# Altium PCB ASP LEDBoard.PcbDoc
Units mm, origin at the board's own origin, x right, y up, seen from the top; angles counter-clockwise.
Board outline 80 x 35 mm, 2 copper layers (Top Layer, Bottom Layer); 57 components, 34 nets, 166 pads, 30 vias.
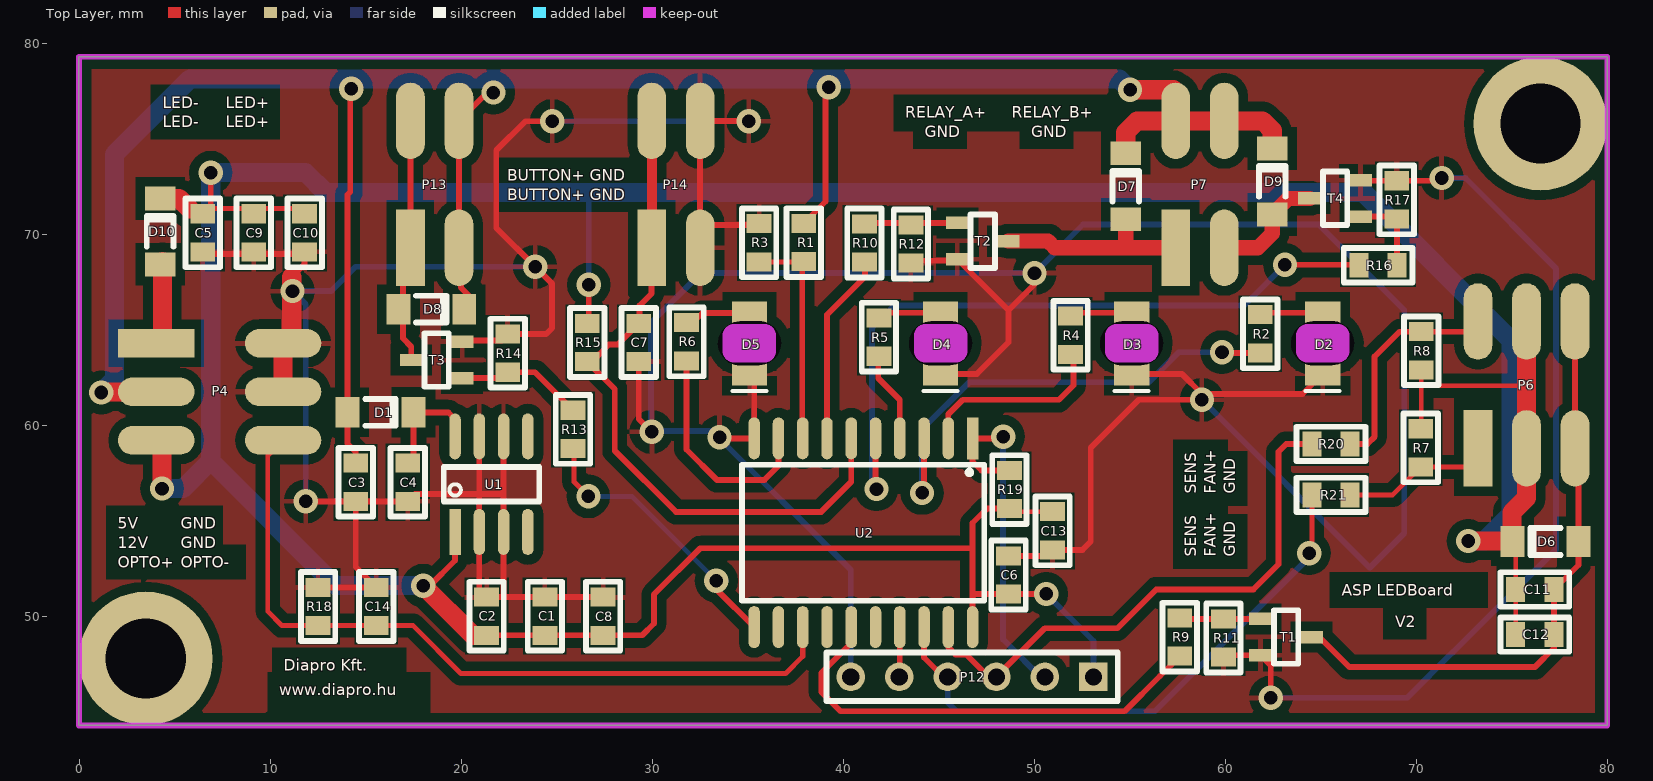
[diagram p0: Top Layer view]
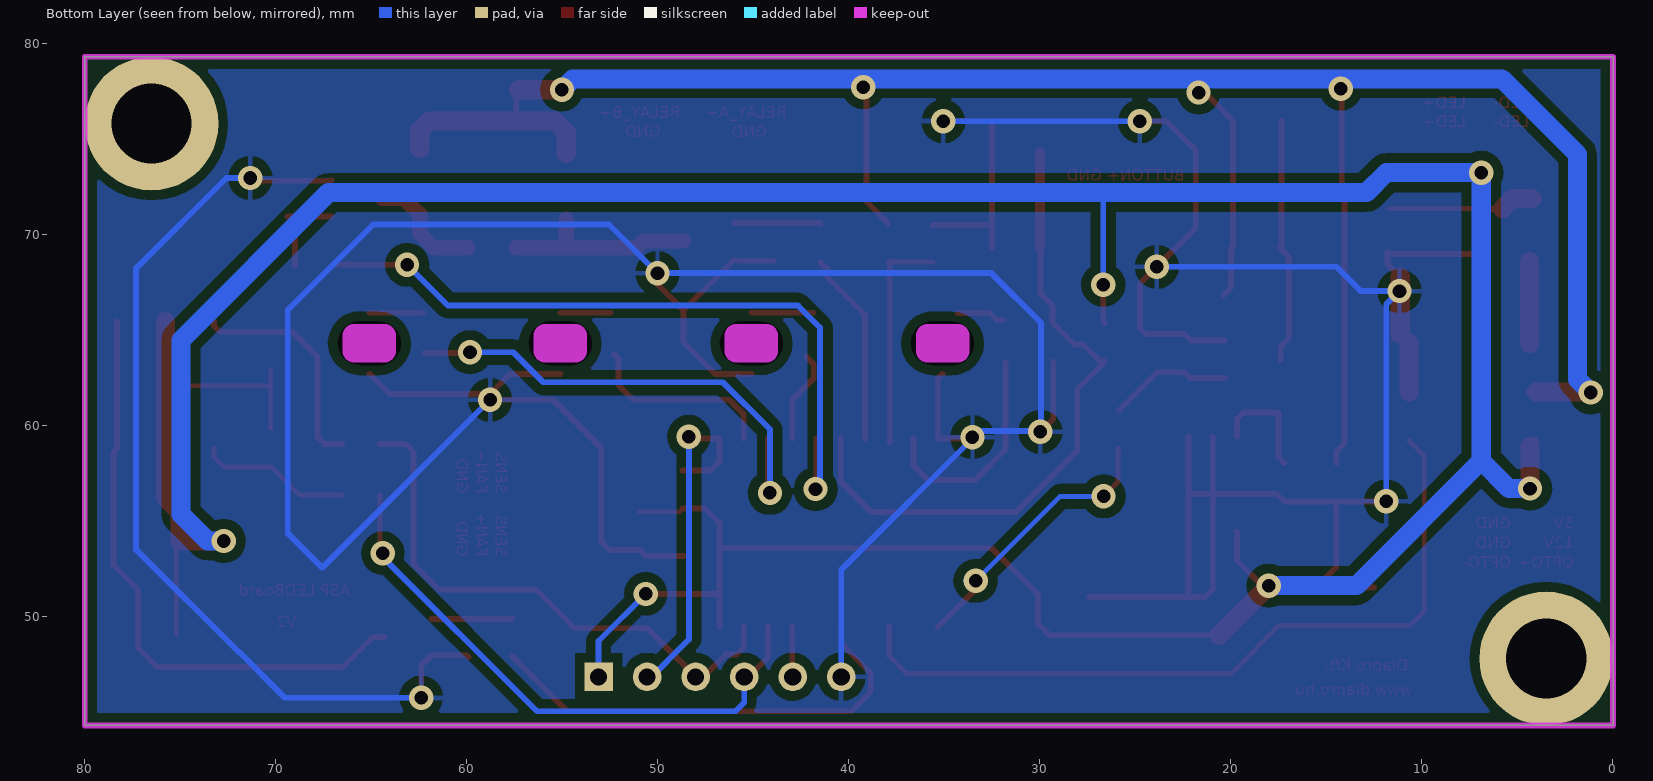
[diagram p1: Bottom Layer view, seen from below]

## Layer stack, top to bottom
Top Layer: signal copper 0.0356
Dielectric: dielectric 0.32, FR-4, Dk 4.8
Bottom Layer: signal copper 0.0356

## Board outline
-0.005,44.323 -0.005,79.323 79.995,79.323 79.995,44.323

## Design rules (kind name [scope] priority, off if disabled: settings)
Clearance Clearance_to_gnd_plane [All vs (InNamedPolygon('Bottom GND'))  or (InNamedPolygon('Top GND'))] p1: gap=0.508
Clearance [All] p2: gap=0.254
PolygonConnect [All] p1: connectstyle=Relief reliefconductorwidth=0.254 reliefentries=4 polygonreliefangle="90 Angle"
RoutingVias [All] p1: holewidth=0.711 width=1.27 viastyle="Through Hole" minholewidth=0.711 minwidth=1.27 maxholewidth=0.711 maxwidth=1.27
SilkToSilkClearance [All] p1 off: silktosilkclearance=0.254
SilkscreenOverComponentPads [All] p1 off: minsilkscreentomaskgap=0.254
SolderMaskExpansion [All] p1: expansion=0.102
Width [All] p1: maxlimit=1.524 minlimit=0.254 preferedwidth=0.254
26 further rules are at their usual default settings.

## Components (designator, comment, footprint, x,y, rotation, side; value= is the part's Value field where it differs from the comment)
C1 "22uF" FP_0805_CAP_085 24.384,50.038 r270 top
C2 "22uF" FP_0805_CAP_085 21.336,50.038 r270 top
C3 "22uF" FP_0805_CAP_085 14.488,57.048 r90 top
C4 "22uF" FP_0805_CAP_085 17.206,57.048 r90 top
C5 "22uF" FP_0805_CAP_085 6.477,70.104 r90 top
C6 "100nF" FP_0805_CAP_085 48.651,52.197 r270 top
C7 "22uF" FP_0805_CAP_085 29.296,64.364 r90 top
C8 "22uF" FP_0805_CAP_085 27.432,50.038 r270 top
C9 "22uF" FP_0805_CAP_085 9.144,70.104 r90 top
C10 "22uF" FP_0805_CAP_085 11.811,70.104 r90 top
C11 "22uF" FP_0805_CAP_085 76.2,51.435 r180 top
C12 "22uF" FP_0805_CAP_085 76.2,49.073 r180 top
C13 "22uF" FP_0805_CAP_085 50.963,54.508 r90 top
C14 "100nF" FP_0805_CAP_085 15.56,50.546 r270 top
D1 "LL4150GS18" SOD-80 15.657,60.706 r270 top
D2 "LED_RED" "1206 LED Reversed" 65.095,64.323 r90 top
D3 "LED_RED" "1206 LED Reversed" 55.095,64.323 r90 top
D4 "LED_RED" "1206 LED Reversed" 45.095,64.323 r90 top
D5 "LED_RED" "1206 LED Reversed" 35.095,64.323 r90 top
D6 "LL4150GS18" SOD-80 76.886,53.95 r90 top
D7 "LL4150GS18" SOD-80 54.788,72.415 r0 top
D8 "LL4150GS18" SOD-80 18.313,66.116 r270 top
D9 "LL4150GS18" SOD-80 62.459,72.669 r0 top
D10 "LL4150GS18" SOD-80 4.242,70.053 r0 top
P4 "Header 3X2" FP_CONN6_2TUSKE_254MM_smd 4.039,64.323 r270 top
P6 "Header 3X2" FP_CONN6_2TUSKE_254MM_smd 73.228,58.823 r0 top
P7 "RELAY2" FP_CONN4_2TUSKE_254MM_smd 57.404,69.323 r0 top
P12 "ISP" HDR1X6 53.096,46.863 r180 top
P13 "LED4" FP_CONN4_2TUSKE_254MM_smd 17.348,69.323 r0 top
P14 "BUTTON" FP_CONN4_2TUSKE_254MM_smd 29.972,69.323 r0 top
R1 "8K2" FP_0805_RES 37.932,69.596 r90 top
R2 "470R" FP_0805_RES 61.834,64.821 r270 top
R3 "4K7" FP_0805_RES 35.596,69.583 r90 top
R4 "470R" FP_0805_RES 51.902,64.745 r270 top
R5 "470R" FP_0805_RES 41.869,64.643 r270 top
R6 "470R" FP_0805_RES 31.798,64.402 r270 top
R7 "1K" FP_0805_RES 70.231,58.852 r90 top
R8 "1K" FP_0805_RES 70.256,63.932 r90 top
R9 "470R" FP_0805_RES 57.617,48.946 r270 top
R10 "470R" FP_0805_RES 41.107,69.571 r270 top
R11 "10K" FP_0805_RES 59.903,48.895 r90 top
R12 "10K" FP_0805_RES 43.546,69.52 r90 top
R13 "470R" FP_0805_RES 25.857,59.817 r270 top
R14 "10K" FP_0805_RES 22.438,63.805 r270 top
R15 "1K" FP_0805_RES 26.604,64.364 r90 top
R16 "470R" FP_0805_RES 67.996,68.405 r180 top
R17 "10K" FP_0805_RES 68.971,71.831 r270 top
R18 "1K" FP_0805_RES 12.512,50.546 r90 top
R19 "10K" FP_0805_RES 48.702,56.667 r270 top
R20 "1K" FP_0805_RES 65.532,59.055 r180 top
R21 "1K" FP_0805_RES 65.532,56.388 r180 top
T1 "Si2306" FET_SOT23 63.18,48.946 r180 top
T2 "Si2306" FET_SOT23 47.305,69.672 r180 top
T3 "Si2306" FET_SOT23 18.72,63.449 r0 top
T4 "Si2306" FET_SOT23 65.745,71.907 r0 top
U1 "78L05" Supply_SOIC8 21.588,56.947 r90 top
U2 "ATTiny2313" DIGITAL_SOIC20W 41.057,54.407 r0 top

## Footprints (in the part's own frame and the unit in brackets; to place one, negate y for a bottom-side part, rotate by r counter-clockwise, add the part's x,y. Pads: shape width x height; smd on the part's side, far side on the other; paste and mask are expansions set on the pad)
"1206 LED Reversed" [mm] "1206 Green LED"
  oct 1.524x2 hole 2.3 slot 3.3 at 90.7 deg unplated: 0(0,0)
  rect 1.2x1.85 smd: A(1.6,0) K(-1.6,0)
  Keep-Out Layer lines w1.2: -0.4,0.8 0.4,0.8 0.4,-0.8 -0.4,-0.8 -0.4,0.8
  silkscreen extent -2.5,-0.9 -2.5,0.9, body extent -1.6,-0.8 1.6,0.8, height 0.5
DIGITAL_SOIC20W [mm]
  rect 0.6x2.2 smd: 1(5.715,4.94)
  oval 0.6x2.2 smd: 2(4.445,4.94) 3(3.175,4.94) 4(1.905,4.94) 5(0.635,4.94) 6(-0.635,4.94) 7(-1.905,4.94) 8(-3.175,4.94) 9(-4.445,4.94) 10(-5.715,4.94) 11(-5.715,-4.94) 12(-4.445,-4.94) 13(-3.175,-4.94) 14(-1.905,-4.94) 15(-0.635,-4.94) 16(0.635,-4.94) 17(1.905,-4.94) 18(3.175,-4.94) 19(4.445,-4.94) 20(5.715,-4.94)
  silkscreen extent -6.35,-3.56 6.32,3.56, body extent -6.4,-5.15 6.4,5.15, height 2.7
FET_SOT23 [mm] "SOT23-3 tok"
  rect 1.2x0.65 smd: D(-1.327,0) G(1.327,-0.95) S(1.327,0.95)
  silkscreen extent -0.64,-1.4 0.64,1.4, body extent -1.27,-1.46 1.27,1.46, height 0.97
FP_0805_CAP_085 [mm] "0805 kapacitás YAGEO 0.85mm magas"
  rect 1x1.3 smd: 1(-1,0) 2(1,0)
  silkscreen extent -1.8,-0.9 1.8,0.9, body extent -1,-0.64 1.03,0.64, height 0.85
FP_0805_RES [mm] "0805 ellenállás"
  rect 1x1.3 smd: 1(-1,0) 2(1,0)
  silkscreen extent -1.8,-0.9 1.8,0.9, body extent -1,-0.62 1,0.63, height 0.62
FP_CONN4_2TUSKE_254MM_smd [mm] "2×2 tüskesor"
  rect 1.5x4 smd: 1(0,0)
  oval 1.5x4 smd: 2(0,6.642) 3(2.54,0) 4(2.54,6.642)
  body extent -1.32,-1.97 3.76,8.62, height 9.81
FP_CONN6_2TUSKE_254MM_smd [mm] "2×3 tüskesor"
  rect 1.5x4 smd: 1(0,0)
  oval 1.5x4 smd: 2(0,6.642) 3(2.54,0) 4(2.54,6.642) 5(5.08,0.001) 6(5.08,6.643)
  body extent -1.32,-1.97 6.3,8.62, height 9.81
HDR1X6 [mm] "Connector; Header; 6 Position"
  rect 1.5x1.5 hole 0.9: 1(0,0)
  round 1.5 hole 0.9: 2(2.54,0) 3(5.08,0) 4(7.62,0) 5(10.16,0) 6(12.7,0)
  silkscreen extent -1.27,-1.27 13.97,1.27
SOD-80 [mm]
  rect 1.6x1.25 smd: A(0,-1.598) K(0,1.852)
  silkscreen extent -0.7,-0.67 0.7,0.93, body extent -0.76,-1.55 0.78,1.8
Supply_SOIC8 [mm]
  rect 2.4x0.6 smd: 1(-2.5,1.905)
  oval 2.4x0.6 smd: 2(-2.5,0.635) 3(-2.5,-0.635) 4(-2.5,-1.905) 5(2.5,-1.905) 6(2.5,-0.635) 7(2.5,0.635) 8(2.5,1.905)
  silkscreen extent -0.9,-2.5 0.9,2.5, body extent -3.03,-2.5 3.03,2.5, height 1.9

## Part data
C1 C2 C3 C4 C5 C6 C7 C8 C9 C10 C11 C12 C13 C14: library part CAP, "Capacitor"
D1 D6 D7 D8 D9 D10: library part DIODE_big
D2 D3 D4 D5: library part LED_R, "Typical LED"
P4 P6: "Header, 3-Pin, Dual row"
P7 P13 P14: library part "Header 2X2H", "Header, 2-Pin, Dual row, Right Angle"
P12: library part "Header 6", "Header, 6-Pin"
R1 R2 R3 R4 R5 R6 R7 R8 R9 R10 R11 R12 R13 R14 R15 R16 R17 R18 R19 R20 R21: library part RES, "Resistor"
T1 T2 T3 T4: library part NMOS
U1: library part 78Lxx_SOIC

## Free pads (board coordinates)
  round 7 hole 4.2: 0(3.495,47.823) 0(76.495,75.823)

## Via types
v1: diameter 1.27, hole 0.711, Top Layer to Bottom Layer, 30 vias

## Nets (pads, with @x,y where several pads share a name; then routed paths per layer and width w, separated by ;. In a path a pad name is that pad's centre, name@x,y a point inside that pad or via, vN(x,y) a via of type N, cw(c..) or ccw(c..) an arc to the next point about the centre after c; other vN are vias at no path point)
5V: C1.2 C2.2 C5.2 C6.2 C8.2 C9.2 C10.2 C11.2 C12.2 C13.2 D6.K D10.K P4.5 P6.3 P6.4 P12.1 R7.2 R8.1 R15.2 R19.2 U1.1 U2.20 | length 217.8
  Top Layer w0.254: C5.2@6.817,71.383 C10.2@11.735,71.383 ; R19.2@48.861,55.508 C13.2 ; R7.2@70.256,59.877 70.256,62.103 ; R8.1 70.256,62.103 ; D6.K 75.2,53.783 C11.2 C12.2 ; 75.768,62.103 70.256,62.103
  Top Layer w0.305: P4.5 P4.5@4.343,58.939 ; 5.782,71.358 C5.2@6.64,71.358 ; C5.2@6.792,71.358 6.817,71.383 6.894,71.46 v1(6.894,73.254) ; v1(18.019,51.638) 18.364,51.638 19.683,52.957 U1.1 ; 20.619,49.038 C2.2 C1.2 C8.2 29.48,49.038 30.099,49.657 30.099,51.181 32.512,53.594 46.772,53.594 ; R15.2 26.68,65.44 v1(26.68,67.386) ; U2.20 46.772,51.054 ; R19.2 47.524,55.667 46.772,54.915 46.772,53.594 ; v1@50.623,51.197 C6.2 46.915,51.197 46.772,51.054 ; D6.K@75.008,53.975 D6.K ; 46.772,51.054 46.772,53.594
  Top Layer w1: D10.K 5.235,71.905 5.782,71.358 ; v1(4.343,56.718) P4.5@4.343,58.939 ; v1(18.019,51.638) 20.619,49.038 ; v1(72.72,53.975) 75.008,53.975 75.008,55.476 75.768,56.236 P6.3 75.768,62.103 P6.4
  Bottom Layer w0.305: 6.894,67.361 6.919,67.386 ; v1(26.68,67.386) 26.68,72.212 ; v1(50.632,51.206) 53.096,48.743 P12.1
  Bottom Layer w1: v1(4.343,56.718) 5.446,56.718 6.894,58.166 ; v1(18.019,51.638) 13.421,51.638 6.894,58.166 ; v1(72.72,53.975) 73.558,53.975 74.955,55.372 74.955,64.491 67.234,72.212 26.68,72.212 12.903,72.212 11.862,73.254 v1(6.894,73.254) 6.894,67.361 6.894,58.166
5V_DC: D10.A P4.1 | length 4.3
  Top Layer w1: P4.1@4.364,64.323 D10.A@4.364,68.594
12V: C3.2 D1.A D7.K D8.K D9.K P4.3 P7.2 P7.4 P13.3 P13.4 R1.2 | length 124.3
  Top Layer w0.305: v1@14.199,77.953 14.199,72.238 14.059,72.098 D1.A 14.059,59.072 14.488,58.642 C3.2 ; P13.3 P13.4 21.368,77.445 v1(21.692,77.445) ; P13.3@19.995,69.323 19.995,67.237 D8.K@20.404,66.827 ; R1.2 39.075,71.739 39.075,77.556 v1(39.243,77.724) ; P7.2@57.277,77.597 57.404,77.47 P7.2
  Top Layer w1: v1@1.204,61.783 P4.3 ; D7.K 54.788,75.362 55.391,75.965 P7.2 P7.4 61.957,75.965 62.459,75.463 D9.K ; v1(55.016,77.597) P7.2@57.277,77.597
  Bottom Layer w1: v1(1.168,61.747) 1.848,62.427 1.848,74.202 5.801,78.156 54.458,78.156 v1(55.016,77.597)
  other v1: 14.249,77.648
12V_MODE: R1.1 R3.1 U2.8 | length 11.7
  Top Layer w0.254: R3.1 R1.1@37.828,68.583
  Top Layer w0.305: U2.8@37.856,59.131 37.856,66.199 37.856,68.555 R1.1@37.898,68.596
BUTTON: C7.2 P14.1 P14.2 R15.1 U2.6 | length 34.7
  Top Layer w0.305: P14.1 29.972,66.929 29.337,66.294 29.337,65.404 C7.2 28.195,64.262 27.737,64.262 26.838,63.364 R15.1 28.042,61.926 28.042,58.699 31.242,55.499 38.847,55.499 40.422,57.074 U2.6
  Top Layer w0.508: P14.1@29.995,69.323 P14.2@29.995,74.323
FAN_OUT_1: P6.2 R8.2 R20.1 | length 11.9
  Top Layer w0.305: R20.1 67.437,59.055 67.818,59.436 67.818,63.627 69.123,64.932 R8.2 72.933,64.932 73.228,65.227 P6.2
FAN_OUT_2: P6.1 R7.1 R21.1 | length 8
  Top Layer w0.254: R21.1 68.767,56.388 R7.1 72.711,57.852 73.228,58.369 P6.1
GND: C1.1 C2.1 C3.1 C4.1 C5.1 C6.1 C7.1 C8.1 C9.1 C10.1 C13.1 C14.1 D2.K D3.K D4.K D5.K P4.2 P4.4 P12.6 P14.3 P14.4 R3.2 R11.1 R12.1 R14.1 R17.1 R18.2 T1.S T2.S T3.S T4.S U1.2 U1.3 U1.6 U1.7 U2.10 | length 315
  Top Layer w0.305: C5.1@6.589,69.002 C10.1@11.811,69.002 ; C5.1@6.64,69.358 C5.1@6.792,69.358 ; P4.2 P4.2@11.135,64.778 ; 11.135,67.803 11.811,68.478 C10.1@11.811,69.002 ; C10.1 C10.1@11.811,69.002 ; v1(11.871,56.048) C3.1 ; R18.2 C14.1 14.488,52.618 C3.1 ; T3.S@20.311,64.465 22.099,64.465 R14.1 24.451,64.805 24.765,65.119 24.765,67.437 v1(23.876,68.326) 21.844,70.358 21.844,74.422 23.368,75.946 v1(24.765,75.946) ; U1.7 20.953,56.439 ; 22.223,51.163 U1.3 22.223,56.439 ; U1.6 22.223,56.439 ; C8.1 C1.1 C2.1 20.953,51.421 U1.2 20.953,56.439 ; C7.1 29.296,60.366 v1(29.972,59.69) ; P14.3 P14.4 v1@34.652,75.965 ; P14.3@32.573,70.51 R3.2@35.596,70.51 ; v1@33.693,59.347 U2.10 35.342,62.476 D5.K ; R12.1@43.927,68.647 T2.S@45.776,68.647 ; D4.K 47,62.723 48.651,64.373 48.651,66.05 ; T2.S 48.651,66.05 ; C6.1 50.651,53.197 C13.1 52.518,53.508 52.959,53.95 52.959,58.852 55.474,61.366 v1(58.776,61.366) 58.928,61.366 58.928,61.519 v1@58.776,61.671 ; v1(50.013,67.996) 50.013,67.412 48.651,66.05 ; D3.K 57.724,62.723 v1@58.776,61.671 ; R11.1 60.004,47.996 T1.S 62.382,47.466 v1(62.382,45.771) ; D2.K 64.043,61.671 v1@58.776,61.671 ; T4.S 67.099,72.831 R17.1 v1@71.104,72.831 ; C3.1 C4.1 17.596,56.439 20.953,56.439 ; 20.953,56.439 22.223,56.439
  Top Layer w1: P4.4 P4.2 ; P4.2@11.135,64.778 11.135,67.803
  Bottom Layer w0.305: v1(11.871,56.048) 11.871,66.361 v1(11.176,67.056) 13.208,67.056 14.478,68.326 v1(23.876,68.326) ; v1(24.765,75.946) v1(35.052,75.946) ; P12.6 40.396,52.466 33.132,59.731 29.931,59.731 29.931,65.39 32.537,67.996 v1(50.013,67.996) 52.553,70.536 64.897,70.536 69.367,66.065 69.367,54.381 67.564,52.578 v1(58.776,61.366) ; v1(62.382,45.771) 69.52,45.771 71.882,48.133 ; v1(71.323,72.974) 72.568,72.974 77.318,68.224 77.318,53.543 71.92,48.146
  other v1: 33.528,59.411
LED0: R2.2 U2.3 | length 25.8
  Top Layer w0.305: v1(44.13,56.49) 44.232,56.591 U2.3 ; v1@59.996,63.821 R2.2@62.215,63.821
  Bottom Layer w0.305: v1@44.13,56.464 v1(44.13,56.49) 44.13,59.817 46.594,62.281 55.991,62.281 57.566,63.856 v1(59.827,63.856)
LED1: R4.2 U2.2 | length 10.2
  Top Layer w0.305: U2.2 45.502,60.604 46.264,61.366 51.293,61.366 52.055,62.128 52.055,63.516 R4.2@52.283,63.745
LED2: R5.2 U2.4 | length 4.9
  Top Layer w0.305: R5.2@42.25,63.643 41.834,63.226 41.834,62.494 42.962,61.366 U2.4
LED3: R6.2 U2.9 | length 11.8
  Top Layer w0.305: R6.2@31.801,63.353 31.801,58.76 33.386,57.175 35.875,57.175 36.612,57.912 U2.9
LED4: R13.2 U2.11 | length 15.8
  Top Layer w0.254: R13.2 25.908,58.766 25.908,57.066 v1(26.662,56.312) ; v1@26.22,56.312 v1(26.662,56.312) ; v1@26.819,56.468 v1(26.662,56.312)
  Top Layer w0.305: v1(33.36,51.892) 33.36,51.448 U2.11
  Bottom Layer w0.254: v1(26.662,56.312) 28.941,56.312 v1(33.36,51.892)
  Bottom Layer w0.305: v1(33.36,51.892) v1@33.868,51.892
MISO: P12.4 R21.2 U2.18 | length 30.4
  Top Layer w0.254: v1(64.389,53.34) 64.532,53.483 R21.2
  Top Layer w0.305: U2.18 44.232,47.879 P12.4@45.476,46.634
  Bottom Layer w0.305: P12.4 45.476,45.517 45.933,45.06 56.318,45.06 v1@64.494,53.235
MOSI: P12.5 U2.17 | length 2.8
  Top Layer w0.305: P12.5@42.936,46.634 42.962,46.66 U2.17
NetC4_2: C4.2 D1.K U1.8 | length 6
  Top Layer w0.305: C4.2 17.509,58.351 D1.K 19.34,60.706 19.683,60.363 U1.8
NetC11_1: C11.1 C12.1 D6.A P6.5 P6.6 T1.D | length 32
  Top Layer w0.305: T1.D@64.287,48.937 64.932,48.937 66.497,47.371 76.2,47.371 77.2,48.371 C12.1 C11.1 78.484,52.719 D6.A 78.484,58.648 P6.5 P6.6 ; T1.D T1.D@64.882,48.946
NetD2_A: D2.A R2.1 | length 2.8
  Top Layer w0.305: R2.1@62.317,65.923 D2.A
NetD3_A: D3.A R4.1 | length 2.6
  Top Layer w0.305: R4.1@52.462,65.923 D3.A
NetD4_A: D4.A R5.1 | length 3.2
  Top Layer w0.305: R5.1@41.869,65.923 D4.A
NetD5_A: D5.A R6.1 | length 2.5
  Top Layer w0.305: R6.1@31.938,65.542 32.268,65.542 32.639,65.913 D5.A@34.29,65.913
NetD7_A: D7.A P7.1 T2.D | length 10.4
  Top Layer w0.8: T2.D 50.724,69.672 51.073,69.323 P7.1 ; 54.788,69.323 D7.A
NetD8_A: D8.A P13.1 P13.2 T3.D | length 12.9
  Top Layer w0.305: P13.1 P13.2 ; T3.D 17.393,64.145 16.954,64.584 16.954,68.822 P13.1@17.455,69.323
NetD9_A: D9.A P7.3 T4.D | length 6.1
  Top Layer w0.8: P7.3 61.703,69.323 62.459,70.079 D9.A 63.295,71.907 T4.D
NetR9_1: R9.1 R11.2 T1.G | length 4.3
  Top Layer w0.305: R9.1 57.667,49.896 T1.G
NetR10_1: R10.1 R12.2 T2.G | length 4.5
  Top Layer w0.305: R10.1@41.488,70.571 41.54,70.622 T2.G
NetR13_1: R13.1 R14.2 T3.G | length 6.5
  Top Layer w0.305: T3.G@20.311,62.509 22.143,62.509 R14.2 23.869,62.805 R13.1
NetR16_1: R16.1 R17.2 T4.G | length 4.9
  Top Layer w0.305: T4.G R17.2@68.971,70.957 ; R16.1 68.996,70.933 R17.2@68.971,70.957 ; R17.2@69.383,70.957 R17.2@68.971,70.957
PROC_SIGNAL: C14.2 P4.6 R18.1 U2.13 | length 40.5
  Top Layer w0.254: P4.6 9.881,58.442 9.881,50.292 10.627,49.546 R18.1 C14.2 17.485,49.546 19.99,47.041 36.982,47.041 37.882,47.94
  Top Layer w0.305: 37.882,47.94 U2.13
PWM: R9.2 U2.15 | length 24.4
  Top Layer w0.305: U2.15 40.422,48.641 38.847,47.066 38.847,46.076 39.863,45.06 54.731,45.06 56.585,46.914 R9.2
RELAY1: R10.2 U2.7 | length 10.2
  Top Layer w0.305: U2.7 39.152,65.822 41.148,67.818 41.148,68.23 R10.2@41.488,68.571
RELAY2: R16.2 U2.5 | length 38
  Top Layer w0.305: U2.5 41.692,56.744 v1(41.742,56.693) ; v1(63.119,68.43) R16.2@66.97,68.43
  Bottom Layer w0.305: v1@41.514,56.617 41.514,65.151 42.657,66.294 60.983,66.294 v1(63.119,68.43)
RESET: P12.2 R19.1 U2.1 | length 18.7
  Top Layer w0.305: v1(48.372,59.436) 48.283,59.347 U2.1 46.772,58.141 47.245,57.667 R19.1
  Bottom Layer w0.305: v1(48.372,59.436) 48.372,48.819 P12.2@50.556,46.634
SCK: P12.3 R20.2 U2.19 | length 29.4
  Top Layer w0.305: U2.19 45.502,48.412 45.883,48.031 46.441,48.031 47.61,46.863 P12.3 50.556,49.403 54.356,49.403 56.388,51.435 61.468,51.435 62.789,52.756 62.789,58.649 63.195,59.055 R20.2 ; P12.3@47.864,46.787 P12.3@48.016,46.634
pads on no net: D2.0 D3.0 D4.0 D5.0 U1.4 U1.5 U2.12 U2.14 U2.16

## Polygon pours and split planes (outlines as drawn)
GND on Bottom Layer "Bottom GND" (solid, pour order 4): -0.005,79.323 79.995,79.323 79.995,44.323 0.112,44.323
GND on Top Layer "Top GND" (solid, pour order 5): -0.005,79.323 79.995,79.323 79.995,44.323 0.112,44.323

## Keep-outs
Keep-Out Layer:
  the board outline again, w0.305

## Other copper
Top Layer:
  text "LED-" at 4.379,76.637 h0.6
  text "LED+" at 7.681,76.637 h0.6
  text "RELAY_A+" at 43.241,76.129 h0.6
  text "RELAY_B+" at 48.829,76.129 h0.6
  text "LED-" at 4.379,75.621 h0.6
  text "LED+" at 7.681,75.621 h0.6
  text "GND" at 44.257,75.113 h0.6
  text "GND" at 49.845,75.113 h0.6
  text "BUTTON+" at 22.413,72.827 h0.6
  text "GND" at 26.731,72.827 h0.6
  text "BUTTON+" at 22.413,71.811 h0.6
  text "GND" at 26.731,71.811 h0.6
  text "SENS" at 58.491,56.449 h0.6 r90
  text "FAN+" at 59.507,56.449 h0.6 r90
  text "GND" at 60.523,56.449 h0.6 r90
  text "5V" at 2.032,54.61 h0.6
  text "GND" at 5.334,54.61 h0.6
  text "12V" at 2.032,53.594 h0.6
  text "GND" at 5.334,53.594 h0.6
  text "SENS" at 58.491,53.147 h0.6 r90
  text "FAN+" at 59.507,53.147 h0.6 r90
  text "GND" at 60.523,53.147 h0.6 r90
  text "OPTO+" at 2.032,52.578 h0.6
  text "OPTO-" at 5.334,52.578 h0.6
  text "ASP LEDBoard" at 66.101,51.11 h0.6
  text "V2" at 68.895,49.459 h0.6
  text "Diapro Kft." at 10.729,47.173 h0.6
  text "www.diapro.hu" at 10.475,45.903 h0.6

## Silkscreen, mask and mechanical layers (free items; w line width, h text height)
Top Overlay:
  text "LED-" at 4.379,76.637 h0.6
  text "LED+" at 7.681,76.637 h0.6
  text "RELAY_A+" at 43.241,76.129 h0.6
  text "RELAY_B+" at 48.829,76.129 h0.6
  text "LED-" at 4.379,75.621 h0.6
  text "LED+" at 7.681,75.621 h0.6
  text "GND" at 44.257,75.113 h0.6
  text "GND" at 49.845,75.113 h0.6
  text "BUTTON+" at 22.413,72.827 h0.6
  text "GND" at 26.731,72.827 h0.6
  text "BUTTON+" at 22.413,71.811 h0.6
  text "GND" at 26.731,71.811 h0.6
  text "SENS" at 58.491,56.449 h0.6 r90
  text "FAN+" at 59.507,56.449 h0.6 r90
  text "GND" at 60.523,56.449 h0.6 r90
  text "5V" at 2.032,54.61 h0.6
  text "GND" at 5.334,54.61 h0.6
  text "12V" at 2.032,53.594 h0.6
  text "GND" at 5.334,53.594 h0.6
  text "SENS" at 58.491,53.147 h0.6 r90
  text "FAN+" at 59.507,53.147 h0.6 r90
  text "GND" at 60.523,53.147 h0.6 r90
  text "OPTO+" at 2.032,52.578 h0.6
  text "OPTO-" at 5.334,52.578 h0.6
  text "ASP LEDBoard" at 66.101,51.11 h0.6
  text "V2" at 68.895,49.459 h0.6
  text "Diapro Kft." at 10.729,47.173 h0.6
  text "www.diapro.hu" at 10.475,45.903 h0.6